# Altium PCB Industrıal Com Board wıth GSM and GPS modules.PcbDoc (part 2 of 2)
Units mm, origin at the board's own origin, x right, y up, seen from the top; angles counter-clockwise.
Board outline 162.76 x 100.02 mm, 2 copper layers (Top Layer, Bottom Layer), stack 0.325 mm thick; 201 components, 89 nets, 674 pads, 144 vias.
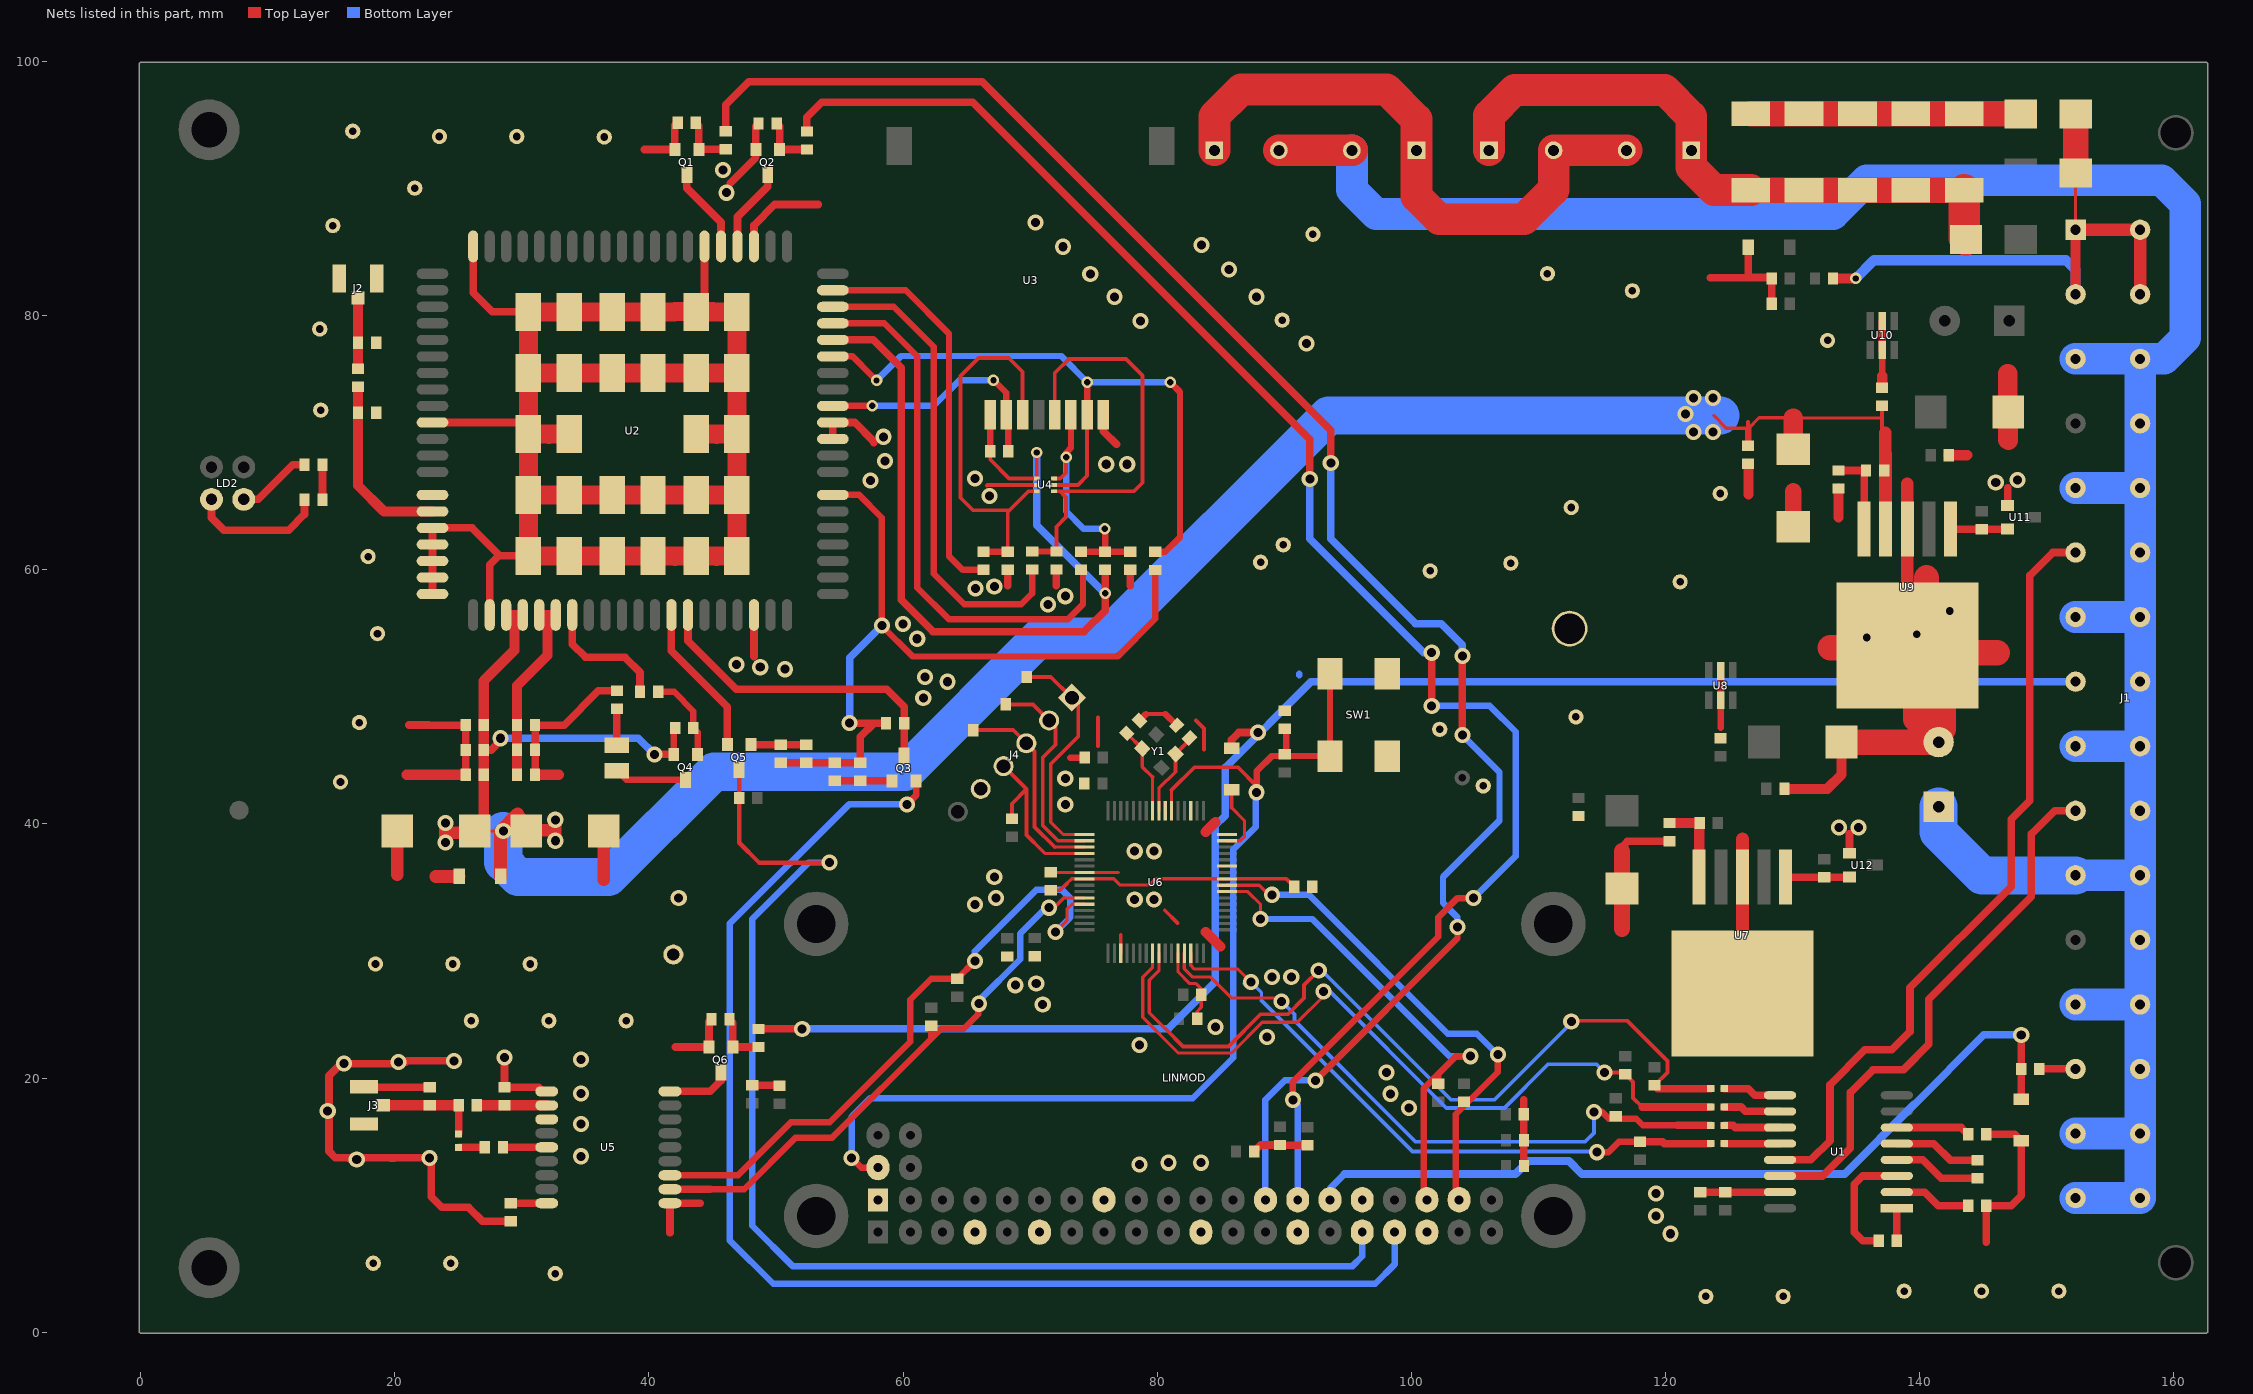
[diagram p2: the nets of this part, all layers, seen from the top]

## Via types
v1: diameter 1.27, hole 0.711, Top Layer to Bottom Layer, 134 vias
v2: diameter 0.9, hole 0.5, Top Layer to Bottom Layer, 10 vias

## Nets (pads, with @x,y where several pads share a name; then routed paths per layer and width w, separated by ;. In a path a pad name is that pad's centre, name@x,y a point inside that pad or via, vN(x,y) a via of type N, cw(c..) or ccw(c..) an arc to the next point about the centre after c; other vN are vias at no path point) (continued)
GND: C2.2 C4.2 C5.2 C6.2 C11.2 C12.2 C13.2 C14.2 C15.2 C16.2 C17.2 C18.2 C19.1 C20.1 C21.1 C23.2 C24.2 C27.2 C28.2 C29.2 C30.2 C31.2 C32.2 C33.2 C34.2 C35.2 C36.2 C37.2 C38.2 C39.2 C40.2 C41.2 C42.2 C43.2 C44.2 C45.2 C46.2 C47.2 C48.1 C49.2 C50.2 C51.2 C52.2 C53.1 C54.1 C55.2 C56.1 D4.2 D5.2 D6.2 J2.2 J2.3 J3.2 J3.3 J4.5 L7.2 LINMOD.6 LINMOD.9 LINMOD.14 LINMOD.20 LINMOD.25 LINMOD.30 LINMOD.34 LINMOD.39 Q1.E Q2.E Q6.E R8.1 R9.1 R21.2 R24.1 R26.1 R32.2 R34.2 R35.2 R38.2 R39.2 R43.2 R44.2 SW1.3 SW1.4 TP1.1 TP2.1 TP3.1 TP4.1 TP5.1 TP6.1 TP11.1 TP12.1 TP13.1 TP14.1 TP15.1 TP16.1 TP17.1 TP18.1 TP19.1 TP20.1 TP21.1 TP22.1 TP23.1 TP24.1 TP25.1 TP26.1 TP27.1 TP28.1 TP29.1 TP30.1 TP31.1 TP33.1 TP34.1 TP35.1 TP36.1 TP37.1 TP39.1 TP40.1 TP41.1 TP42.1 TP44.1 TP45.1 TP46.1 TP47.1 TP48.1 TP50.1 TP51.1 TP52.1 TP53.1 TP54.1 U1.15 U2.8 U2.9 U2.19 U2.22 U2.36 U2.46 U2.48 U2.50 U2.51 U2.52 U2.53 U2.54 U2.56 U2.72 U2.85 U2.86 U2.87 U2.88 U2.89 U2.90 U2.91 U2.92 U2.93 U2.94 U2.95 U2.96 U2.97 U2.98 U2.99 U2.100 U2.101 U2.102 U2.103 U2.104 U2.105 U2.106 U2.107 U2.108 U2.109 U2.110 U2.111 U2.112 U3.8 U4.2 U5.1 U5.10 U5.12 U6.3 U6.12 U6.27 U6.32 U6.35 U6.39 U6.55 U7.3 U7.6 U8.2 U8.5 U9.3 U9.6 U10.2 U10.5 U11.1 U12.1 | length 498.8
  Top Layer w0.25: U7.6@122.926,26.711 122.926,29.627 U7.6@126.049,29.627 ; U7.6@123.048,23.927 123.676,23.927 123.707,23.895 U7.6@128.218,23.895 ; U7.6@125.979,26.721 126.049,26.721 U7.6@128.28,26.721 ; U7.6@126.049,26.659 128.218,26.659 U7.6@128.28,26.721 ; U7.6@127.11,29.169 126.049,28.108 125.027,27.087 125.752,26.362 U7.6@128.218,23.895 ; U7.6@128.218,23.895 128.258,23.856 129.489,23.856 129.479,23.866 129.057,23.866 128.218,24.705 128.218,25.541 129.398,26.721 U7.6@128.28,26.721
  Top Layer w0.254: C37.2@71.882,36.171 U6.55@74.287,36.171 76.938,36.171 ; U6.3@77.137,29.821 77.137,31.29 ; U6.12@81.637,29.821 81.637,28.345 82.55,27.432 83.058,27.432 83.464,27.026 C34.2@83.464,26.797 ; C40.2@83.145,24.663 83.145,25.233 83.464,25.552 C34.2@83.464,26.543 ; 83.566,39.37 83.82,39.37 ; 84.582,40.132 84.709,40.132
  Top Layer w0.3: 66.594,66.619 66.646,66.671 U4.2@70.534,66.671
  Top Layer w0.305: 75.336,46.101 75.336,48.362 ; 79.121,48.641 80.645,48.641 ; 80.593,33.199 81.609,32.183 ; 83.058,48.133 83.693,47.498 83.693,45.847
  Top Layer w0.5: 124.353,47.564 U8.5@124.353,49.719 U8.2@124.353,52.019 ; 137.053,75.245 U10.2@137.053,77.277
  Top Layer w0.508: 73.152,45.212 C36.2@74.295,45.212 ; C33.2@78.613,48.133 79.121,48.641 ; 80.645,48.641 C32.2@81.534,47.752
  Top Layer w0.6: R34.2@14.326,65.512 R35.2@14.326,68.265 ; v1@16.439,13.67 17.236,13.67 v1@17.282,13.716 ; J3.3@17.576,19.326 17.628,19.274 C27.2@22.769,19.274 ; 19.715,13.711 19.98,13.711 19.985,13.716 ; 21.133,47.777 22.673,47.777 22.678,47.773 C13.2@25.582,47.773 C12.2@25.582,45.812 C14.2@25.582,43.861 ; U2.54@22.978,58.085 U2.53@22.978,59.384 U2.52@22.978,60.684 U2.51@22.978,61.984 U2.50@22.978,63.285 26.083,63.285 28.283,61.084 ; U2.46@22.978,71.584 29.628,71.584 U2.87@30.528,70.684 ; v1(24.658,21.346) 20.95,21.346 20.869,21.265 v1(20.315,21.265) 20.173,21.123 19.517,21.123 19.507,21.133 v1(16.002,21.133) 15.778,21.133 14.834,20.188 14.834,14.224 15.342,13.716 v1@17.282,13.716 ; U2.36@26.178,85.435 26.178,81.792 27.686,80.284 U2.89@30.528,80.284 ; U2.56@27.478,56.435 27.478,60.386 28.176,61.084 28.283,61.084 ; v1(28.641,21.62) C28.2@28.641,19.274 31.344,19.274 31.667,18.95 U5.10@31.966,18.95 ; R24.1@29.129,8.727 26.914,8.727 25.806,9.835 23.703,9.835 22.89,10.648 22.89,13.716 v1(22.733,13.716) 19.985,13.716 ; U2.85@30.528,61.084 28.283,61.084 ; C16.2@31.049,43.861 C17.2@31.049,45.832 C18.2@31.049,47.773 33.335,47.773 36.038,50.475 R21.2@37.49,50.475 ; 39.66,93.061 Q1.E@42.052,93.061 42.052,94.955 R8.1@42.266,95.169 ; 41.666,7.813 U5.1@41.666,10.15 44.059,10.15 ; 42.098,22.438 Q6.E@44.734,22.438 44.734,24.435 R26.1@44.928,24.628 ; U2.22@44.378,85.435 44.378,80.976 45.039,80.315 ; 46.411,90.394 48.417,92.4 Q2.E@48.417,93.061 48.417,94.899 R9.1@48.631,95.113 ; C29.2@48.133,19.431 50.246,19.431 C30.2@50.277,19.401 ; 48.278,53.169 U2.72@48.278,56.435 ; U2.19@48.278,85.435 48.278,87.11 49.906,88.737 53.32,88.737 ; U2.8@54.478,70.284 U2.9@54.478,71.584 56.208,71.584 57.709,70.084 57.709,69.987 ; 68.24,58.73 C20.1@68.24,60 ; 72.07,58.74 C21.1@72.07,60.01 ; U3.8@75.755,72.193 75.755,70.904 76.799,69.86 ; 77.881,58.74 C19.1@77.881,60 ; C54.1@87.63,14.224 88.138,14.732 C56.1@89.662,14.732 89.687,14.707 C55.2@91.821,14.707 ; C53.1@108.839,12.954 C35.2@108.839,17.145 108.839,18.288 ; 116.698,38.326 117.01,38.638 R43.2@120.305,38.638 ; C5.2@122.733,11.024 C6.2@124.694,11.024 U1.15@129.002,11.024 ; 123.52,82.961 126.477,82.961 126.503,82.988 ; D5.2@126.503,85.354 126.503,82.988 ; R32.2@128.351,80.924 C31.2@128.351,82.916 128.279,82.988 126.503,82.988 ; U12.1@134.475,37.686 134.475,39.235 ; U10.2@137.053,77.277 U10.5@137.053,79.577 ; 145.247,7.082 C2.2@145.247,9.947 147.188,9.947 147.991,10.749 D6.2@147.991,15.058 147.463,15.585 C4.2@145.247,15.585 ; U11.1@146.914,65.065 146.914,66.446 ; v1@17.282,13.716 19.985,13.716
  Top Layer w0.8: 20.939,43.861 C14.2@25.582,43.861 ; C16.2@31.049,43.861 32.919,43.861 ; 83.82,31.496 84.963,30.353 ; 83.82,39.37 84.582,40.132 ; 126.533,65.933 C52.2@126.533,68.326 ; C45.2@129.357,42.753 132.73,42.753 133.855,43.878 C44.2@133.855,46.431 ; 133.604,64.12 R39.2@133.604,66.385 ; 137.053,75.245 137.053,74.681 R38.2@137.058,74.676 ; C50.2@142.291,69.007 143.723,69.007 143.739,69.022
  Top Layer w1: 20.211,36.014 C11.2@20.211,39.431 ; 23.226,35.865 D4.2@25.066,35.865 ; C15.2@36.451,39.431 36.451,35.634 36.459,35.626 ; U7.6@126.049,26.659 126.049,26.721 126.049,28.108 126.049,29.627 U7.3@126.049,35.804 126.049,38.8 ; C51.2@130.048,63.371 130.048,63.226 C51.2@130.068,63.205 ; U9.6@139.023,54.04 U9.3@139.023,63.185 139.023,66.76 ; 146.939,70.211 146.98,70.17
  Top Layer w1.27: 116.586,31.75 C46.2@116.586,34.923 116.586,37.846 ; C51.2@130.048,63.371 130.048,66.167
  Top Layer w1.5: 32.14,75.485 U2.88@30.528,75.485 ; 32.141,75.484 U2.93@33.727,75.484 ; U2.92@33.728,70.684 32.163,70.684 32.136,70.658 32.109,70.684 U2.87@30.528,70.684 ; U2.93@33.728,75.485 33.734,75.479 38.694,75.479 ; U2.95@37.128,61.084 38.712,61.084 ; U2.97@37.128,75.485 38.688,75.485 38.694,75.479 ; U2.98@37.128,80.284 38.72,80.284 38.73,80.274 ; 41.996,75.485 U2.101@40.328,75.485 38.721,75.485 38.705,75.468 38.694,75.479 ; 41.997,75.485 U2.106@43.728,75.485 45.313,75.485 45.334,75.463 45.355,75.485 U2.111@46.928,75.485 ; U2.105@43.728,70.684 45.277,70.684 45.339,70.622 45.401,70.684 U2.110@46.928,70.684 ; U2.107@43.728,80.284 43.733,80.294 45.019,80.294 ; C49.2@146.972,72.41 146.98,72.402 146.98,70.17 ; U2.86@30.528,65.885 U2.87@30.528,70.684 ; U2.86@30.528,65.885 U2.85@30.528,61.084 32.123,61.084 32.126,61.082 32.128,61.084 U2.90@33.728,61.084 33.731,61.082 38.71,61.082 38.712,61.084 ; U2.86@30.528,65.885 32.153,65.885 32.156,65.888 33.725,65.888 U2.91@33.728,65.885 35.4,65.885 35.403,65.888 35.405,65.885 U2.96@37.128,65.885 38.728,65.885 38.73,65.883 38.732,65.885 U2.100@40.328,65.885 41.994,65.885 42.007,65.872 42.019,65.885 U2.104@43.728,65.885 45.327,65.885 45.344,65.867 45.361,65.885 U2.109@46.928,65.885 ; U2.87@30.528,70.684 U2.88@30.528,75.485 ; U2.88@30.528,75.485 U2.89@30.528,80.284 32.116,80.284 32.121,80.279 32.126,80.284 U2.94@33.728,80.284 35.367,80.284 35.377,80.274 38.73,80.274 ; 38.712,61.084 38.72,61.092 38.727,61.084 U2.99@40.328,61.084 42.014,61.084 42.042,61.057 42.07,61.084 U2.103@43.728,61.084 45.276,61.084 45.314,61.046 45.352,61.084 U2.108@46.928,61.084 U2.109@46.928,65.885 ; 38.73,80.274 38.74,80.284 U2.102@40.328,80.284 42.001,80.284 42.012,80.274 42.047,80.315 45.039,80.315 45.019,80.294 ; 45.019,80.294 44.983,80.259 45.344,80.259 45.369,80.284 U2.112@46.928,80.284 U2.111@46.928,75.485 ; U2.109@46.928,65.885 U2.110@46.928,70.684 ; U2.110@46.928,70.684 U2.111@46.928,75.485
  Top Layer w1.524: 146.939,70.211 146.939,75.438
  Top Layer w2: 132.956,53.858 U9.6@138.1,53.858 ; C44.2@133.855,46.431 L7.2@141.488,46.431 139.7,48.219 139.7,53.363 U9.6@139.023,54.04 ; U9.6@140.537,54.216 140.537,59.36 ; U9.6@140.957,53.477 U9.6@141.214,53.477 ; 141.214,48.628 U9.6@141.214,53.477 ; U9.6@141.214,53.772 U9.6@141.214,53.477 ; L7.2@141.869,47.447 U9.6@141.869,52.591 ; 146.101,53.477 U9.6@141.214,53.477
  other v1: 120.388,7.747 119.245,9.144 119.245,10.922 78.613,13.208 80.899,13.335 83.439,13.335 17.018,13.589 34.671,13.843 34.671,16.383 14.732,17.399 99.822,17.653 98.348,18.76 34.671,18.796 98.044,20.447 34.671,21.463 78.613,22.606 88.646,23.241 84.582,24.003 70.993,25.781 68.834,27.305 70.485,27.432 89.027,27.94 90.551,27.94 65.659,33.655 78.232,34.036 79.756,34.036 42.352,34.163 67.31,34.163 67.183,35.814 78.232,37.846 79.756,37.846 133.647,39.708 135.171,39.708 72.771,41.529 72.771,43.561 61.595,49.911 63.5,51.181 61.722,51.562 50.719,52.167 48.768,52.324 46.909,52.548 61.119,54.563 59.99,55.723 71.42,57.247 72.771,57.912 65.705,58.517 67.183,58.674 66.802,65.786 145.984,66.868 57.45,67.026 147.701,67.056 65.659,67.183 75.992,68.296 77.643,68.296 58.593,68.55 58.466,70.455 91.755,77.79 78.674,79.568 76.642,81.473 87.818,81.473 74.737,83.251 85.659,83.632 72.578,85.41 83.5,85.537 70.419,87.315 46.101,89.662 45.847,91.44
GND_SIGNAL: C9.2 C10.2 J1.5 J1.6 J1.8 J1.9 J1.10 J1.12 J1.13 J1.14 J1.16 J1.17 J1.18 J1.20 J1.21 J1.22 J1.24 J1.25 J1.26 J1.28 J1.29 J1.30 J1.31 J1.32 L7.1 | length 212.7
  Top Layer w2.5: C10.2@89.58,93 C9.2@95.32,93
  Bottom Layer w2.5: C9.2@95.32,93 95.32,89.887 97.231,87.975 133.167,87.975 135.839,90.648 159.034,90.648 160.894,88.788 160.894,78.252 159.23,76.589 J1.6@157.345,76.589 ; J1.31@152.265,10.549 J1.32@157.345,10.549 J1.30@157.345,15.629 ; J1.29@152.265,15.629 J1.30@157.345,15.629 ; J1.25@152.265,25.789 J1.26@157.345,25.789 ; J1.21@152.265,35.949 J1.22@157.345,35.949 ; J1.17@152.265,46.109 J1.18@157.345,46.109 ; J1.13@152.265,56.269 J1.14@157.345,56.269 ; J1.9@152.265,66.429 J1.10@157.345,66.429 ; J1.5@152.265,76.589 J1.6@157.345,76.589 ; J1.30@157.345,15.629 J1.28@157.345,20.709 J1.26@157.345,25.789 ; J1.26@157.345,25.789 J1.24@157.345,30.869 J1.22@157.345,35.949 ; J1.22@157.345,35.949 J1.20@157.345,41.029 J1.18@157.345,46.109 ; J1.18@157.345,46.109 J1.16@157.345,51.189 J1.14@157.345,56.269 ; J1.14@157.345,56.269 J1.12@157.345,61.349 J1.10@157.345,66.429 ; J1.10@157.345,66.429 J1.8@157.345,71.509 J1.6@157.345,76.589
  Bottom Layer w3: L7.1@141.488,41.351 141.488,39.36 144.899,35.949 J1.21@152.265,35.949
GPS-RST: Q6.C U5.9 | length 5
  Top Layer w0.6: U5.9@41.666,18.95 44.827,18.95 45.674,19.797 Q6.C@45.674,20.432
GPS_RST_CPU: D7.1 J1.15 R25.1 | length 127.4
  Top Layer w0.6: R25.1@48.626,23.861 48.631,23.866 v1(52.07,23.866) ; D7.1@85.852,45.958 85.852,46.609 86.426,47.183 v1(87.945,47.183)
  Bottom Layer w0.6: v1(52.07,23.866) 80.889,23.866 84.582,27.559 84.582,39.878 85.344,40.64 85.344,44.43 92.103,51.189 J1.15@152.265,51.189
GPS_RX: J1.19 U1.14 | length 42.7
  Top Layer w0.6: U1.14@129.002,12.294 132.354,12.294 134.529,14.468 134.529,18.857 136.327,20.655 138.725,20.655 140.716,22.647 140.716,26.182 148.783,34.249 148.783,39.197 150.615,41.029 J1.19@152.265,41.029
GPS_TX: J1.11 U1.13 | length 61.1
  Top Layer w0.6: U1.13@129.002,13.564 131.43,13.564 132.944,15.077 132.944,19.467 135.687,22.21 137.81,22.21 139.233,23.632 139.233,27.097 147.198,35.062 147.198,40.345 148.671,41.819 148.671,59.538 150.483,61.349 J1.11@152.265,61.349
LTE_ON/OFF: Q1.C U2.21 | length 6.7
  Top Layer w0.6: Q1.C@42.992,91.054 42.992,90.033 45.678,87.347 U2.21@45.678,85.435
LTE_ON/OFF_CPU: J1.27 R40.1 | length 2.9
  Top Layer w0.6: R40.1@149.413,20.716 152.258,20.716 J1.27@152.265,20.709
LTE_ON/OFF_MC: LINMOD.15 R6.1 | length 139.3
  Top Layer w0.508: v1(92.456,19.812) 103.632,30.988 v1(103.632,31.877)
  Top Layer w0.6: R6.1@46.053,94.496 46.053,96.589 47.864,98.4 66.223,98.4 93.66,70.963 v1(93.66,68.392) ; v1(104.013,46.99) v1(104.013,53.213)
  Bottom Layer w0.508: LINMOD.15@88.519,10.414 88.519,18.288 90.043,19.812 v1(92.456,19.812) ; v1(103.632,31.877) 103.632,32.639 102.489,33.782 102.489,35.814 106.934,40.259 106.934,44.069 v1(104.013,46.99) 103.886,47.117 v1@103.759,47.117
  Bottom Layer w0.6: v1(93.66,68.392) 93.66,62.423 100.33,55.753 102.362,55.753 104.013,54.102 v1(104.013,53.213)
LTE_RST: Q2.C U2.20 | length 6.6
  Top Layer w0.6: U2.20@46.978,85.435 46.978,87.771 49.357,90.15 Q2.C@49.357,91.054
LTE_RST_MC: LINMOD.13 R7.1 | length 129.9
  Top Layer w0.508: v1(90.678,18.288) 90.678,19.685 102.108,31.115 102.108,32.639 103.632,34.163 v1(104.902,34.163)
  Top Layer w0.6: R7.1@52.441,94.483 52.441,95.59 53.624,96.774 65.491,96.774 92.009,70.256 v1(92.009,67.122) ; v1(101.6,49.276) v1(101.6,53.467)
  Bottom Layer w0.508: v1(90.678,18.288) 91.059,17.907 LINMOD.13@91.059,10.414 ; v1(101.6,49.276) 106.172,49.276 108.204,47.244 108.204,37.465 v1(104.902,34.163)
  Bottom Layer w0.6: v1(92.009,67.122) 92.009,62.423 100.965,53.467 v1(101.6,53.467)
LTE_RX: J1.7 U1.7 | length 77.6
  Top Layer w0.6: U1.7@138.196,17.374 141.011,17.374 143.723,20.086 143.723,24.912 147.31,28.499 158.862,28.499 159.385,29.022 159.385,68.839 159.106,69.118 153.477,69.118 152.265,70.33 J1.7@152.265,71.509
LTE_RX: Q3.C R14.1 U2.68 | length 26.8
  Top Layer w0.25: 60.086,46.086 R14.1@60.086,47.915
  Top Layer w0.6: U2.68@43.078,56.435 43.078,54.397 46.888,50.587 58.715,50.587 60.086,49.215 R14.1@60.086,47.915 60.091,47.91 Q3.C@60.091,45.39
LTE_RX_MC: LINMOD.10 Q5.C R18.1 | length 97.1
  Top Layer w0.356: Q5.C@47.111,44.227 R18.1@47.111,42.043 47.111,38.517 48.671,36.957 v1(54.229,36.957)
  Bottom Layer w0.508: v1(54.229,36.957) 52.578,36.957 48.133,32.512 48.133,8.382 51.308,5.207 95.377,5.207 96.139,5.969 LINMOD.10@96.139,7.874
LTE_TX: J1.23 U1.8 | length 22.2
  Top Layer w0.6: U1.8@138.196,18.644 140.523,18.644 142.179,20.3 142.179,25.461 147.587,30.869 J1.23@152.265,30.869
LTE_TX: Q5.E U2.67 | length 12
  Top Layer w0.6: U2.67@41.778,56.435 41.778,53.614 46.172,49.221 Q5.E@46.172,46.234
LTE_TX_MC: LINMOD.8 Q3.E | length 101.8
  Top Layer w0.508: v1(60.325,41.529) 61.031,42.235 Q3.E@61.031,43.384
  Bottom Layer w0.508: v1(60.325,41.529) 55.753,41.529 46.355,32.131 46.355,7.239 49.784,3.81 97.155,3.81 98.679,5.334 LINMOD.8@98.679,7.874
NetC1_1: C1.1 U1.1 | length 2.6
  Top Layer w0.6: C1.1@138.196,7.193 U1.1@138.196,9.754
NetC1_2: C1.2 U1.3 | length 9.6
  Top Layer w0.6: C1.2@136.774,7.193 135.504,7.193 134.844,7.854 134.844,11.633 135.504,12.294 U1.3@138.196,12.294
NetC2_1: C2.1 U1.2 | length 6.1
  Top Layer w0.6: U1.2@138.196,11.024 140.391,11.024 141.468,9.947 C2.1@143.825,9.947
NetC3_1: C3.1 U1.4 | length 7
  Top Layer w0.6: U1.4@138.196,13.564 140.249,13.564 141.712,12.101 C3.1@144.546,12.101
NetC3_2: C3.2 U1.5 | length 6.9
  Top Layer w0.6: U1.5@138.196,14.834 141.112,14.834 142.423,13.523 C3.2@144.546,13.523
NetC4_1: C4.1 U1.6 | length 5.8
  Top Layer w0.6: U1.6@138.196,16.104 143.266,16.104 143.784,15.585 C4.1@143.825,15.585
NetC7_1: C7.1 C8.1 D3.1 R1.2 R2.2 R3.2 R4.2 R5.2 | length 50.5
  Top Layer w2: R1.2@126.7,89.865 R2.2@130.9,89.865 R3.2@135.1,89.865 R4.2@139.3,89.865 R5.2@143.5,89.865
  Top Layer w2.5: C8.1@106.117,93 106.117,95.733 108.133,97.749 119.929,97.749 122.025,95.653 C7.1@122.025,93 122.025,91.67 123.83,89.865 R1.2@126.7,89.865 ; R5.2@143.5,89.865 143.5,86.106 D3.1@143.637,85.969
NetC7_2: C7.2 C8.2 C9.1 C10.1 | length 47.8
  Top Layer w2.5: C10.1@84.5,93 84.5,95.666 86.614,97.78 98.054,97.78 100.4,95.434 C9.1@100.4,93 100.4,89.369 102.189,87.579 108.854,87.579 111.197,89.922 C8.2@111.197,93 C7.2@116.945,93
NetC19_2: C19.2 R13.1 R15.2 U3.6 U4.6 | length 21.1
  Top Layer w0.3: 72.373,67.171 U4.6@71.884,67.171 72.373,67.171 ; 72.373,67.171 72.834,67.632 ; 72.834,67.632 v2(72.834,68.841) 72.834,67.632
  Top Layer w0.5: v2(72.834,68.841) 72.834,69.212 73.215,69.593 U3.6@73.215,72.193 ; R13.1@74,61.422 R15.2@75.9,61.422 ; v2(75.875,63.226) 75.9,63.2 R15.2@75.9,61.422 ; C19.2@77.881,61.422 R15.2@75.9,61.422
  Bottom Layer w0.5: v2(72.834,68.841) 72.834,64.59 74.198,63.226 v2(75.875,63.226)
NetC20_2: C20.2 R12.1 U3.3 U4.3 | length 33.3
  Top Layer w0.3: C20.2@68.24,61.422 68.24,64.521 69.89,66.171 ; U3.3@69.406,72.193 69.406,75.578 68.316,76.667 65.949,76.667 64.516,75.235 64.516,65.659 65.496,64.679 68.377,64.679 69.869,66.171 69.89,66.171 ; U4.3@70.534,66.171 69.89,66.171
  Top Layer w0.5: R12.1@66.33,61.422 C20.2@68.24,61.422
NetC21_2: C21.2 R11.1 U3.5 U4.4 | length 34.5
  Top Layer w0.3: U3.5@71.945,72.193 71.945,75.471 73.05,76.576 77.541,76.576 78.852,75.265 78.852,66.843 78.18,66.171 U4.4@71.884,66.171 72.33,66.171 72.834,65.667 72.834,64.137 72.07,63.373 C21.2@72.07,61.432
  Top Layer w0.5: R11.1@70.17,61.432 C21.2@72.07,61.432
NetC23_1: C23.1 R10.1 U2.49 | length 14.5
  Top Layer w0.8: R10.1@17.12,74.381 C23.1@17.12,72.349 17.12,66.619 19.154,64.585 U2.49@22.978,64.585
NetC24_1: C24.1 J2.1 R10.2 | length 5.6
  Top Layer w0.8: R10.2@17.12,75.803 C24.1@17.12,77.845 J2.1@17.12,81.381
NetC25_2: C25.2 Q3.B R16.2 | length 4.5
  Top Layer w0.6: R16.2@54.63,43.384 C25.2@56.642,43.384 Q3.B@59.151,43.384
NetC26_2: C26.2 Q5.B R20.2 | length 4.3
  Top Layer w0.6: Q5.B@48.051,46.234 C26.2@50.378,46.234 R20.2@52.379,46.234
NetC27_1: C27.1 J3.1 L5.2 R22.1 | length 8.2
  Top Layer w0.6: L5.2@25.039,15.611 25.044,15.616 R22.1@25.044,17.851
  Top Layer w0.8: J3.1@19.101,17.851 C27.1@22.769,17.851 R22.1@25.044,17.851
NetC28_1: C28.1 R22.2 U5.11 | length 5.5
  Top Layer w0.8: R22.2@26.467,17.851 C28.1@28.641,17.851 31.965,17.851 U5.11@31.966,17.849
NetD2_2: D2.2 R1.1 R2.1 R3.1 R4.1 R5.1 | length 21.3
  Top Layer w2: R1.1@126.7,95.86 R2.1@130.9,95.86 R3.1@135.1,95.86 R4.1@139.3,95.86 R5.1@143.5,95.86 D2.2@147.95,95.86
NetD6_1: D6.1 LINMOD.11 R40.2 | length 66.2
  Top Layer w0.6: D6.1@147.991,18.328 R40.2@147.991,20.716 v1(147.991,23.398)
  Bottom Layer w0.508: LINMOD.11@93.599,10.414 93.599,11.303 94.742,12.446
  Bottom Layer w0.6: 139.563,17.907 145.054,23.398 v1(147.991,23.398)
  Bottom Layer w0.635: 94.742,12.446 108.204,12.446 109.22,13.462 112.395,13.462 113.411,12.446 134.102,12.446 139.563,17.907
NetIC1_42: R54.1 U5.3 U6.60 | length 50.3
  Top Layer w0.254: v1(72.009,31.496) 72.898,32.385 72.898,33.274 73.295,33.671 U6.60@74.287,33.671
  Top Layer w0.508: U5.3@41.666,12.349 47.02,12.349 51.181,16.51 54.229,16.51 60.579,22.86 60.579,26.162 62.23,27.813 R54.1@64.262,27.813 v1(65.659,29.21)
  Bottom Layer w0.508: v1(65.659,29.21) 65.659,29.972 70.485,34.798 72.517,34.798 73.152,34.163 73.152,32.639 v1(72.009,31.496)
NetIC1_43: R53.1 U5.2 U6.59 | length 44.8
  Top Layer w0.254: 72.652,34.171 U6.59@74.287,34.171
  Top Layer w0.3: v1(71.501,33.401) 71.882,33.401 72.652,34.171
  Top Layer w0.305: 62.23,23.241 62.293,23.177 ; R53.1@62.484,24.105 R53.1@62.484,24.13
  Top Layer w0.508: 44.823,11.25 47.498,11.25 51.562,15.314 54.43,15.314 62.293,23.177 62.992,23.876 64.77,23.876 65.913,25.019 v1@65.913,25.781 ; 62.23,23.241 R53.1@62.23,24.105
  Top Layer w0.6: U5.2@41.666,11.25 44.823,11.25
  Bottom Layer w0.508: v1(65.974,25.847) 65.974,26.096 69.215,29.337 69.215,31.369 71.247,33.401 v1(71.501,33.401)
NetIC1_58: LINMOD.5 R50.1 U6.23 | length 39.6
  Top Layer w0.254: U6.23@85.487,34.671 87.122,34.671 88.138,33.655 v1(88.138,32.512)
  Top Layer w0.508: LINMOD.5@101.219,10.414 100.965,10.668 100.965,19.177 102.108,20.32 ; R50.1@102.108,19.558 102.108,20.32 ; v1(104.648,21.717) 103.505,21.717 102.108,20.32
  Bottom Layer w0.508: v1(88.138,32.512) 92.202,32.512 102.997,21.717 v1(104.648,21.717)
NetIC1_59: LINMOD.3 R52.1 U6.24 | length 39.7
  Top Layer w0.254: U6.24@85.487,35.171 88.019,35.171 88.773,34.417 v1(89.027,34.417)
  Top Layer w0.5: 103.505,17.145 106.807,20.447 v1(106.807,21.844)
  Top Layer w0.508: 103.505,17.145 103.505,10.668 LINMOD.3@103.759,10.414
  Bottom Layer w0.5: v1(89.027,34.417) 91.948,34.417 102.87,23.495 105.156,23.495 v1(106.807,21.844)
NetIC1_60: 
NetL1_2: L1.2 U1.11 | length 4.5
  Top Layer w0.6: L1.2@124.623,16.276 125.324,16.276 125.496,16.104 U1.11@129.002,16.104
NetL2_2: L2.2 U1.10 | length 4.5
  Top Layer w0.6: L2.2@124.623,17.719 125.943,17.719 126.289,17.374 U1.10@129.002,17.374
NetL3_2: L3.2 U1.12 | length 4.4
  Top Layer w0.6: L3.2@124.623,14.834 U1.12@129.002,14.834
NetL4_2: L4.2 U1.9 | length 4.6
  Top Layer w0.6: L4.2@124.623,19.162 126.492,19.162 127.01,18.644 U1.9@129.002,18.644
NetL5_1: L5.1 R23.1 | length 2.1
  Top Layer w0.6: L5.1@25.039,14.544 27.092,14.544 R23.1@27.097,14.549
NetLD1_1: LD1.1 Q4.3 | length 5.7
  Top Layer w0.5: LD1.1@37.49,44.186 37.51,44.186 38.237,43.459 Q4.3@42.901,43.459
NetLD1_2: LD1.2 R21.1 | length 2.9
  Top Layer w0.6: LD1.2@37.49,46.193 R21.1@37.49,49.053
NetLD2_1: LD2.1 R34.1 | length 10.8
  Top Layer w0.6: LD2.1@5.588,65.532 5.588,64.099 6.574,63.114 11.674,63.114 12.903,64.343 R34.1@12.903,65.512
NetLD2_4: LD2.4 R35.1 | length 5.9
  Top Layer w0.6: LD2.4@8.128,65.532 9.266,65.532 11.999,68.265 R35.1@12.903,68.265
NetQ1_B: Q1.B R6.2 R8.2 | length 4.3
  Top Layer w0.6: R8.2@43.688,95.169 43.932,94.925 Q1.B@43.932,93.061 43.945,93.073 R6.2@46.053,93.073
NetQ2_B: Q2.B R7.2 R9.2 | length 4.3
  Top Layer w0.6: R9.2@50.053,95.113 50.297,94.869 Q2.B@50.297,93.061 R7.2@52.441,93.061
NetQ4_1: Q4.1 R17.2 R19.1 | length 6.9
  Top Layer w0.5: R19.1@40.731,50.384 41.991,50.384 43.505,48.87 R17.2@43.505,47.539 43.84,47.203 Q4.1@43.84,45.466
NetQ6_B: Q6.B R25.2 R26.2 | length 4.3
  Top Layer w0.6: R26.2@46.35,24.628 46.614,24.364 Q6.B@46.614,22.438 R25.2@48.626,22.438
NetR23_2: R23.2 U5.14 | length 6.9
  Top Layer w0.6: R23.2@28.519,14.549 U5.14@31.966,14.55 R23.2@28.519,14.549
NetR24_2: R24.2 U5.18 | length 2.8
  Top Layer w0.6: R24.2@29.129,10.15 U5.18@31.966,10.15
NetR37_2: R37.2 R39.1 U9.5 | length 6.9
  Top Layer w0.6: R39.1@133.604,67.808 R37.2@135.778,67.808 135.623,67.653 U9.5@135.623,63.185
NetR42_2: R42.2 R43.1 U7.5 | length 6.7
  Top Layer w0.8: R43.1@120.305,40.061 R42.2@122.692,40.061 122.649,40.018 U7.5@122.649,35.804
OSC1: C32.1 U6.40 Y1.1 | length 6.7
  Top Layer w0.254: U6.40@80.137,41.021 80.137,42.799 81.445,44.107
  Top Layer w0.305: 81.445,44.107 Y1.1@81.445,45.508 82.54,46.603 C32.1@82.54,46.746
OSC2: C33.1 U6.41 Y1.3 | length 7
  Top Layer w0.254: U6.41@79.637,41.021 79.637,43.68
  Top Layer w0.305: C33.1@77.607,47.127 78.802,45.932 Y1.3@78.829,45.932 78.829,44.488 79.609,43.708 79.637,43.68
RST: C43.1 LINMOD.44 R33.2 SW1.1 SW1.2 U6.38 | length 85.7
  Top Layer w0.254: U6.38@81.137,41.021 81.137,42.656
  Top Layer w0.305: 81.137,42.656 82.931,44.45 86.36,44.45 87.818,42.992 v1(87.818,42.484)
  Top Layer w0.508: v1(55.958,13.716) 56.72,12.954 LINMOD.44@58.039,12.954 ; v1@87.818,42.992 87.818,44.13 89.027,45.339 R33.2@90.17,45.339 ; C43.1@90.043,47.473 90.17,47.346 R33.2@90.17,45.339 ; SW1.1@93.599,45.316 SW1.1@93.599,45.339 ; SW1.2@93.599,51.816 SW1.1@93.599,45.339 ; R33.2@90.17,45.339 SW1.1@93.599,45.339
  Bottom Layer w0.508: v1(55.958,13.716) 55.958,16.969 57.404,18.415 82.804,18.415 85.979,21.59 85.979,37.973 87.757,39.751 v1@87.757,42.672
STATUS: R19.2 U2.61 | length 10.1
  Top Layer w0.6: U2.61@33.978,56.435 33.978,54.14 35.022,53.096 38.12,53.096 39.309,51.908 R19.2@39.309,50.384
sysnjtrs:  | length 0.1
  Bottom Layer w0.508: 91.186,51.689 91.186,51.816
TCK: J4.4 R27.2 U6.52 | length 14.1
  Top Layer w0.254: 70.993,37.846 71.168,37.671 U6.52@74.287,37.671
  Top Layer w0.305: J4.4@67.909,44.541 69.723,42.727 ; R27.2@68.58,40.411 68.58,41.584 69.723,42.727 ; 70.993,37.846 69.723,39.116 69.723,42.727
TDI: J4.2 R29.2 U6.50 | length 16.6
  Top Layer w0.254: 72.2,38.671 U6.50@74.287,38.671
  Top Layer w0.305: R29.2@68.097,49.403 70.231,49.403 J4.2@71.501,48.133 72.009,47.625 72.009,46.228 70.993,45.212 70.993,39.878 72.2,38.671
TDO: J4.1 R30.2 U6.49 | length 18.2
  Top Layer w0.254: 71.628,40.132 72.589,39.171 U6.49@74.287,39.171
  Top Layer w0.305: R30.2@69.748,51.562 71.628,51.562 73.261,49.929 J4.1@73.297,49.929 73.787,49.439 73.787,46.863 71.628,44.704 71.628,40.132
TMS: J4.3 R28.2 U6.51 | length 16
  Top Layer w0.254: 71.938,38.171 U6.51@74.287,38.171
  Top Layer w0.305: R28.2@65.532,47.371 68.671,47.371 J4.3@69.705,46.337 70.358,45.684 70.358,39.751 71.938,38.171
UART1_RXD: L2.1 R47.2 U6.8 | length 60.8
  Top Layer w0.254: U6.8@79.637,29.821 79.637,28.702 78.867,27.932 78.867,24.765 81.661,21.971 85.852,21.971 88.265,24.384 91.022,24.384 93.091,26.453 v1(93.091,26.797)
  Top Layer w0.305: v1(115.189,20.447) 116.688,20.447 R47.2@116.84,20.295 117.45,19.685 117.45,18.44 118.171,17.719
  Top Layer w0.6: 118.171,17.719 L2.1@123.556,17.719
  Bottom Layer w0.305: v1(93.091,26.797) 93.599,26.797 102.743,17.653 107.315,17.653 110.744,21.082 114.554,21.082 v1(115.189,20.447)
UART1_TXD: L4.1 R49.2 U6.9 | length 65.2
  Top Layer w0.254: U6.9@80.137,29.821 80.137,28.448 79.375,27.686 79.375,25.146 80.645,23.876
  Top Layer w0.305: 80.645,23.876 82.042,22.479 85.598,22.479 88.138,25.019 90.297,25.019 91.567,26.289 91.567,27.305 v1(92.71,28.448) ; v1@112.649,24.511 116.967,24.511 120.142,21.336 120.142,20.447 R49.2@119.126,19.431
  Top Layer w0.6: R49.2@119.126,19.431 119.395,19.162 L4.1@123.556,19.162
  Bottom Layer w0.305: v1(92.71,28.448) 92.71,28.702 103.124,18.288 106.553,18.288 112.583,24.318 v1(112.583,24.45)
UART3_RX: L1.1 R46.2 U6.13 | length 51
  Top Layer w0.254: U6.13@82.137,29.821 82.137,28.607 82.804,27.94 84.201,27.94 85.852,26.289 89.535,26.289 v1(89.789,26.035)
  Top Layer w0.508: v1(114.361,17.338) 114.996,17.338 115.545,16.789 117.704,16.789 118.217,16.276 120.924,16.276
  Top Layer w0.6: 120.924,16.276 L1.1@123.556,16.276
  Bottom Layer w0.305: v1(89.789,26.035) 90.805,25.019 90.805,24.511 100.33,14.986 113.665,14.986 114.361,15.682 v1(114.361,17.338)
UART3_TX: L3.1 R48.2 U6.14 | length 48.9
  Top Layer w0.254: U6.14@82.637,29.821 82.637,28.869 82.931,28.575 86.36,28.575 v1(87.376,27.559)
  Top Layer w0.508: v1(114.615,14.163) 115.509,14.163 116.332,14.986 R48.2@117.983,14.986
  Top Layer w0.6: R48.2@117.983,14.986 119.761,14.986 119.913,14.834 L3.1@123.556,14.834
  Bottom Layer w0.254: v1(87.376,27.559) 88.201,26.733 88.201,26.098
  Bottom Layer w0.305: v1@86.868,27.432 v1@87.058,27.241 ; 88.201,26.098 100.076,14.224 114.3,14.224 v1@114.452,14.376
uc_gps_rst: D7.2 U6.31 | length 5.6
  Top Layer w0.254: U6.31@85.487,38.671 86.55,38.671 86.868,38.989 86.868,40.259 85.852,41.275
  Top Layer w0.3: 85.852,41.275 D7.2@85.852,42.688
USIM_CLK: R11.2 U2.16 | length 38.1
  Top Layer w0.5: U2.16@54.478,80.684 59.27,80.684 62.423,77.531 62.423,59.67 64.816,57.277 69.317,57.277 70.17,58.13 R11.2@70.17,60.01
USIM_DATA: R13.2 U2.15 | length 43.3
  Top Layer w0.5: U2.15@54.478,79.384 58.528,79.384 61.133,76.779 61.133,58.583 63.622,56.093 72.984,56.093 74.168,57.277 74.168,59.832 R13.2@74,60
USIM_GND: C22.2 U2.10 U3.2 | length 19.6
  Top Layer w0.5: U2.10@54.478,72.884 v2(57.59,72.884) ; v2(67.117,74.9) 67.147,74.9 68.135,73.911 U3.2@68.135,72.193 68.135,71.473 68.285,71.323 C22.2@68.285,69.312
  Bottom Layer w0.5: v2(57.59,72.884) 62.43,72.884 64.445,74.9 v2(67.117,74.9)
USIM_PRESENCE: R41.2 U2.13 U3.7 U4.5 | length 54.2
  Top Layer w0.3: U4.5@71.884,66.671 73.763,66.671 74.486,67.394 U3.7@74.486,72.193
  Top Layer w0.5: U2.13@54.478,76.785 56.027,76.785 57.546,75.26 v2(57.917,74.889) ; U3.7@74.486,72.193 74.493,72.2 v2(74.493,74.757) ; R41.2@79.853,61.402 80.645,61.402 81.798,62.555 81.798,73.975 81.026,74.747 v2(81.026,74.752)
  Bottom Layer w0.5: v2(57.917,74.889) 59.837,76.81 72.441,76.81 v2(74.493,74.757) 81.021,74.757 v2(81.026,74.752)
USIM_RST: R12.2 U2.17 | length 31.2
  Top Layer w0.5: U2.17@54.478,81.984 60.205,81.984 63.622,78.567 63.622,61.062 64.684,60 R12.2@66.33,60
USIM_VDD: C22.1 R15.1 U2.14 U3.1 U4.1 | length 68.7
  Top Layer w0.25: U4.1@70.531,67.174 U4.1@70.534,67.171
  Top Layer w0.3: C22.1@66.863,69.312 66.863,68.661 68.354,67.171 U4.1@70.534,67.171 ; U4.1@70.531,67.174 v2(70.531,69.22)
  Top Layer w0.5: C22.1@66.863,69.312 66.863,72.19 U3.1@66.865,72.193
  Top Layer w0.6: U2.14@54.478,78.085 57.653,78.085 59.853,75.885 59.853,57.628 62.362,55.118 74.239,55.118 75.9,56.779 v2(75.9,58.141) R15.1@75.9,60
  Bottom Layer w0.6: v2(70.531,69.22) 70.531,63.49 75.88,58.141 v2(75.9,58.141)
V_INPUT: D1.1 D2.1 J1.1 J1.2 J1.3 J1.4 R31.1 | length 46.3
  Top Layer w0.25: J1.1@152.265,86.749 152.265,91.193 D1.1@152.268,91.196
  Top Layer w0.8: R31.1@133.177,82.916 v2(134.96,82.916) ; J1.3@152.265,81.669 J1.1@152.265,86.749
  Top Layer w1: J1.1@152.265,86.749 J1.2@157.345,86.749 J1.4@157.345,81.669
  Top Layer w2: D1.1@152.268,91.196 D2.1@152.268,95.86
  Bottom Layer w0.8: v2(134.96,82.916) 136.393,84.348 151.516,84.348 152.265,83.599 J1.3@152.265,81.669
VBAT_BB: C11.1 C12.1 C13.1 C14.1 C15.1 C16.1 C17.1 C18.1 C51.1 C52.1 D4.1 Q4.2 R17.1 R37.1 R38.1 U2.57 U2.58 U2.59 U2.60 U9.4 | length 215.4
  Top Layer w0.25: C11.1@26.311,39.431 28.335,39.431 v1(28.55,39.431) C15.1@30.351,39.431 ; 123.779,72.136 124.785,71.13 126.492,71.13 126.533,71.13 127.353,71.95 130.068,71.95 130.076,71.943 137.033,71.943 ; 137.201,69.505 137.201,70.739
  Top Layer w0.305: 126.492,71.13 126.492,71.628 ; 130.048,71.93 130.068,71.95 ; R38.1@137.033,72.898 137.033,71.943 137.033,70.907 137.201,70.739
  Top Layer w0.5: Q4.2@41.961,45.466 41.961,47.417 R17.1@42.083,47.539
  Top Layer w0.508: C52.1@126.492,69.748 126.492,71.13
  Top Layer w0.6: C12.1@27.005,45.812 27.595,45.812 28.321,46.538 v1(28.321,46.736) ; v1(40.447,45.466) Q4.2@41.961,45.466
  Top Layer w0.8: C11.1@26.311,39.431 26.311,39.834 27.005,40.528 C14.1@27.005,43.861 C12.1@27.005,45.812 C13.1@27.005,47.773 27.005,51.247 29.423,53.665 29.423,56.429 29.417,56.435 ; U2.57@28.778,56.435 29.417,56.435 ; C16.1@29.626,43.861 C17.1@29.626,45.832 C18.1@29.626,47.773 29.626,50.871 32.024,53.269 32.024,56.408 32.018,56.418 31.399,56.418 U2.59@31.382,56.435 ; 29.68,40.79 30.351,40.119 C15.1@30.351,39.431 ; U2.58@30.078,56.435 29.417,56.435 ; U2.59@31.378,56.435 U2.59@31.382,56.435 ; U2.60@32.678,56.435 U2.59@31.382,56.435
  Top Layer w1: v1(24.003,38.542) 24.003,39.304 ; v1(24.003,40.066) 24.003,39.304 ; C11.1@26.311,39.431 26.184,39.304 24.003,39.304 ; D4.1@28.335,35.865 28.335,39.431 28.335,39.437 28.331,39.441 29.68,40.79 ; C15.1@30.351,39.431 30.414,39.494 32.639,39.494 ; v1(32.639,38.669) 32.639,39.494 ; v1(32.639,40.32) 32.639,39.494
  Top Layer w1.016: 137.287,70.739 137.301,67.808 U9.4@137.323,63.185
  Top Layer w1.524: C51.1@130.048,69.471 130.048,71.93
  Bottom Layer w0.6: v1(28.321,46.736) 39.177,46.736 v1(40.447,45.466)
  Bottom Layer w3: v1(28.55,39.431) 28.55,36.982 29.718,35.814 36.84,35.814 45.121,44.094 60.198,44.094 70.841,54.737 76.073,54.737 93.472,72.136 124.333,72.136
  other v1: 122.199,70.841 123.723,70.841 121.564,72.238 122.199,73.508 123.723,73.508
VCC_RESET: R36.2 U9.1 U11.2 | length 4.5
  Top Layer w0.6: U9.1@142.423,63.185 R36.2@144.892,63.185 U11.2@146.914,63.185
VCC_RESET2: R45.2 U7.1 U12.2 | length 5
  Top Layer w0.6: U7.1@129.449,35.804 R45.2@132.497,35.804 134.473,35.804 U12.2@134.475,35.806
VDCC: C37.1 C39.1 U6.25 U6.56 | length 20.2
  Top Layer w0.254: 72.898,35.306 73.263,35.671 U6.56@74.287,35.671 76.597,35.671 77.089,35.179 79.375,35.179 79.867,35.671 U6.25@85.487,35.671 90.161,35.671
  Top Layer w0.305: C37.1@71.628,34.773 72.365,34.773 72.898,35.306 ; 90.161,35.671 C39.1@90.78,35.052
VDD_EXT: C25.1 C26.1 R14.2 R16.1 R20.1 R41.1 U2.7 | length 65.1
  Top Layer w0.5: R41.1@79.853,59.98 79.853,56.129 76.891,53.167 60.767,53.167 v1(58.339,55.596) 58.339,64.079 56.533,65.885 ; 56.533,65.885 U2.7@54.478,65.885 56.533,65.885
  Top Layer w0.6: C26.1@50.378,44.811 R20.1@52.379,44.811 54.625,44.811 R16.1@54.63,44.806 C25.1@56.642,44.806 56.642,46.838 57.719,47.915 R14.2@58.663,47.915 58.654,47.925 v1(55.799,47.925)
  Bottom Layer w0.6: v1(55.799,47.925) 55.799,53.056 v1(58.339,55.596)
pads on no net: J1.33 J1.34 J10.1 J11.1 LINMOD. LINMOD.7 LINMOD.12 LINMOD.16 LINMOD.18 LINMOD.19 LINMOD.21 LINMOD.22 LINMOD.23 LINMOD.24 LINMOD.26 LINMOD.27 LINMOD.28 LINMOD.29 LINMOD.31 LINMOD.32 LINMOD.33 LINMOD.35 LINMOD.36 LINMOD.37 LINMOD.38 LINMOD.41 LINMOD.42 LINMOD.43 TP8.1 U2.1 U2.2 U2.3 U2.4 U2.5 U2.6 U2.11 U2.12 U2.18 U2.23 U2.24 U2.25 U2.26 U2.27 U2.28 U2.29 U2.30 U2.31 U2.32 U2.33 U2.34 U2.35 U2.37 U2.38 U2.39 U2.40 U2.41 U2.42 U2.43 U2.44 U2.45 U2.47 U2.55 U2.62 U2.63 U2.64 U2.65 U2.66 U2.69 U2.70 U2.71 U2.113 U2.114 U2.115 U2.116 U2.141 U2.142 U2.143 U2.144 U3.4 U3.A U3.B U5.4 U5.5 U5.6 U5.7 U5.13 U5.15 U5.16 U5.17 U6.1 U6.4 U6.5 U6.6 U6.7 U6.10 U6.15 U6.16 U6.17 U6.18 U6.19 U6.20 U6.21 U6.22 U6.28 U6.29 U6.30 U6.33 U6.34 U6.36 U6.43 U6.44 U6.45 U6.46 U6.47 U6.48 U6.53 U6.57 U6.58 U6.61 U6.62 U6.63 Y1.2 Y1.4

## Polygon pours and split planes (outlines as drawn)
GND on Top Layer "655" (solid, remove dead copper, pour order 12): 154.823,1.186 12.827,1.186 12.827,11.993 36.526,11.993 36.526,23.677 12.837,23.677 12.837,60.888 26.203,60.888 26.121,87.431 12.797,87.431 12.797,98.692 154.823,98.692
GND on Top Layer "653" (solid, pour order 6): 12.903,87.142 25.781,87.142 25.781,61.356 12.903,61.356
GND on Top Layer "651" (solid, pour order 5): 13.015,23.327 13.015,12.476 35.814,12.476 35.814,23.327
+3V3 on Top Layer "865" (solid, pour order 8): 110.363,42.875 110.363,45.75 122.428,45.75 122.428,44.125 124.938,44.125 124.938,33.64 123.749,33.64 123.749,42.875
VBAT_BB on Top Layer "879" (solid, pour order 10): 120.904,73.649 135.433,73.66 135.433,72.309 137.8,72.309 137.8,61.062 136.835,61.062 136.835,70.754 120.904,70.754
+5VF on Top Layer "881" (solid, pour order 11): 140.218,61.021 140.218,67.92 139.355,67.92 139.355,83.231 143.551,83.231 143.551,70.541 141.224,70.541 141.224,61.021
NetC7_1 on Top Layer "885" (solid, pour order 3): 145.014,92.246 145.014,84.846 141.478,84.846 141.478,88.097 120.66,88.097 120.66,95.077 123.261,95.077 123.261,92.277
V_INPUT on Top Layer "883" (solid, pour order 4): 150.998,96.998 150.998,80.904 158.12,80.904 158.12,90.14 156.23,90.14 156.23,96.998
+5VF on Top Layer "867" (solid, pour order 9): 126.238,48.585 129.743,48.585 129.743,44.308 128.311,44.308 128.311,33.64 127.163,33.64 127.163,40.203 126.238,40.203
VBAT_BB on Top Layer "847" (solid, pour order 7): 32.843,57.516 32.833,53.326 29.982,50.475 29.982,41.565 31.933,41.565 31.933,37.673 24.811,37.673 24.811,41.565 26.65,41.565 26.65,51.694 28.55,53.594 28.55,57.516
GND on Bottom Layer "665" (solid, remove dead copper, pour order 2): 155.001,0.996 13.005,0.996 13.005,98.501 155.001,98.501

## Keep-outs
Keep-Out Layer:
  lines w0.2: 0,0 0,99.822 162.56,99.822 162.56,0 0,0

## Other copper
Top Layer:
  pour cut-out: 42.244,73.496 42.252,73.477 42.252,67.889 42.244,67.87 42.225,67.862 35.225,67.862 35.206,67.87 35.198,67.889 35.198,73.477 35.206,73.496 35.225,73.504 42.225,73.504
  pour cut-out: 52.739,83.199 52.747,83.18 52.747,58.196 52.739,58.177 52.72,58.169 48.423,58.169 48.403,58.177 48.396,58.196 48.396,83.18 48.403,83.199 48.423,83.207 52.72,83.207
  pour cut-out: 18.038,84.007 18.046,83.988 18.046,82.301 18.038,82.282 18.019,82.274 16.2,82.274 16.181,82.282 16.173,82.301 16.173,83.988 16.181,84.007 16.2,84.015 18.019,84.015
  pour cut-out: 18.216,18.774 18.224,18.755 18.224,16.937 18.216,16.918 18.197,16.91 16.51,16.91 16.491,16.918 16.483,16.937 16.483,18.755 16.491,18.774 16.51,18.782 18.197,18.782
Bottom Layer:
  region net VBAT_BB: 21.844,43.053 33.274,43.053 35.56,40.767 35.56,36.195 22.987,36.195 21.844,37.338

## Silkscreen, mask and mechanical layers (free items; w line width, h text height)
Top Overlay:
  text "ISBAK A.S." at 96.784,77.582 h1.43
  text "1" at 134.844,76.363 h0.95
  text "DS327-00/100921" at 92.598,74.554 h1.43
  text "1" at 70.531,67.818 h0.95 r90
  text "1" at 124.917,52.619 h0.95
  text "NET" at 38.735,41.783 h0.95
  text "STATUS" at 38.735,40.386 h0.95
  text "1" at 139.822,8.931 h0.95